# Altium PCB PCB1.PcbDoc (part 2 of 2)
Units mil, origin at the board's own origin, x right, y up, seen from the top; angles counter-clockwise.
Board outline 3937.01 x 3937.01 mil, 2 copper layers (Top Layer, Bottom Layer); 175 components, 130 nets, 583 pads, 648 vias.
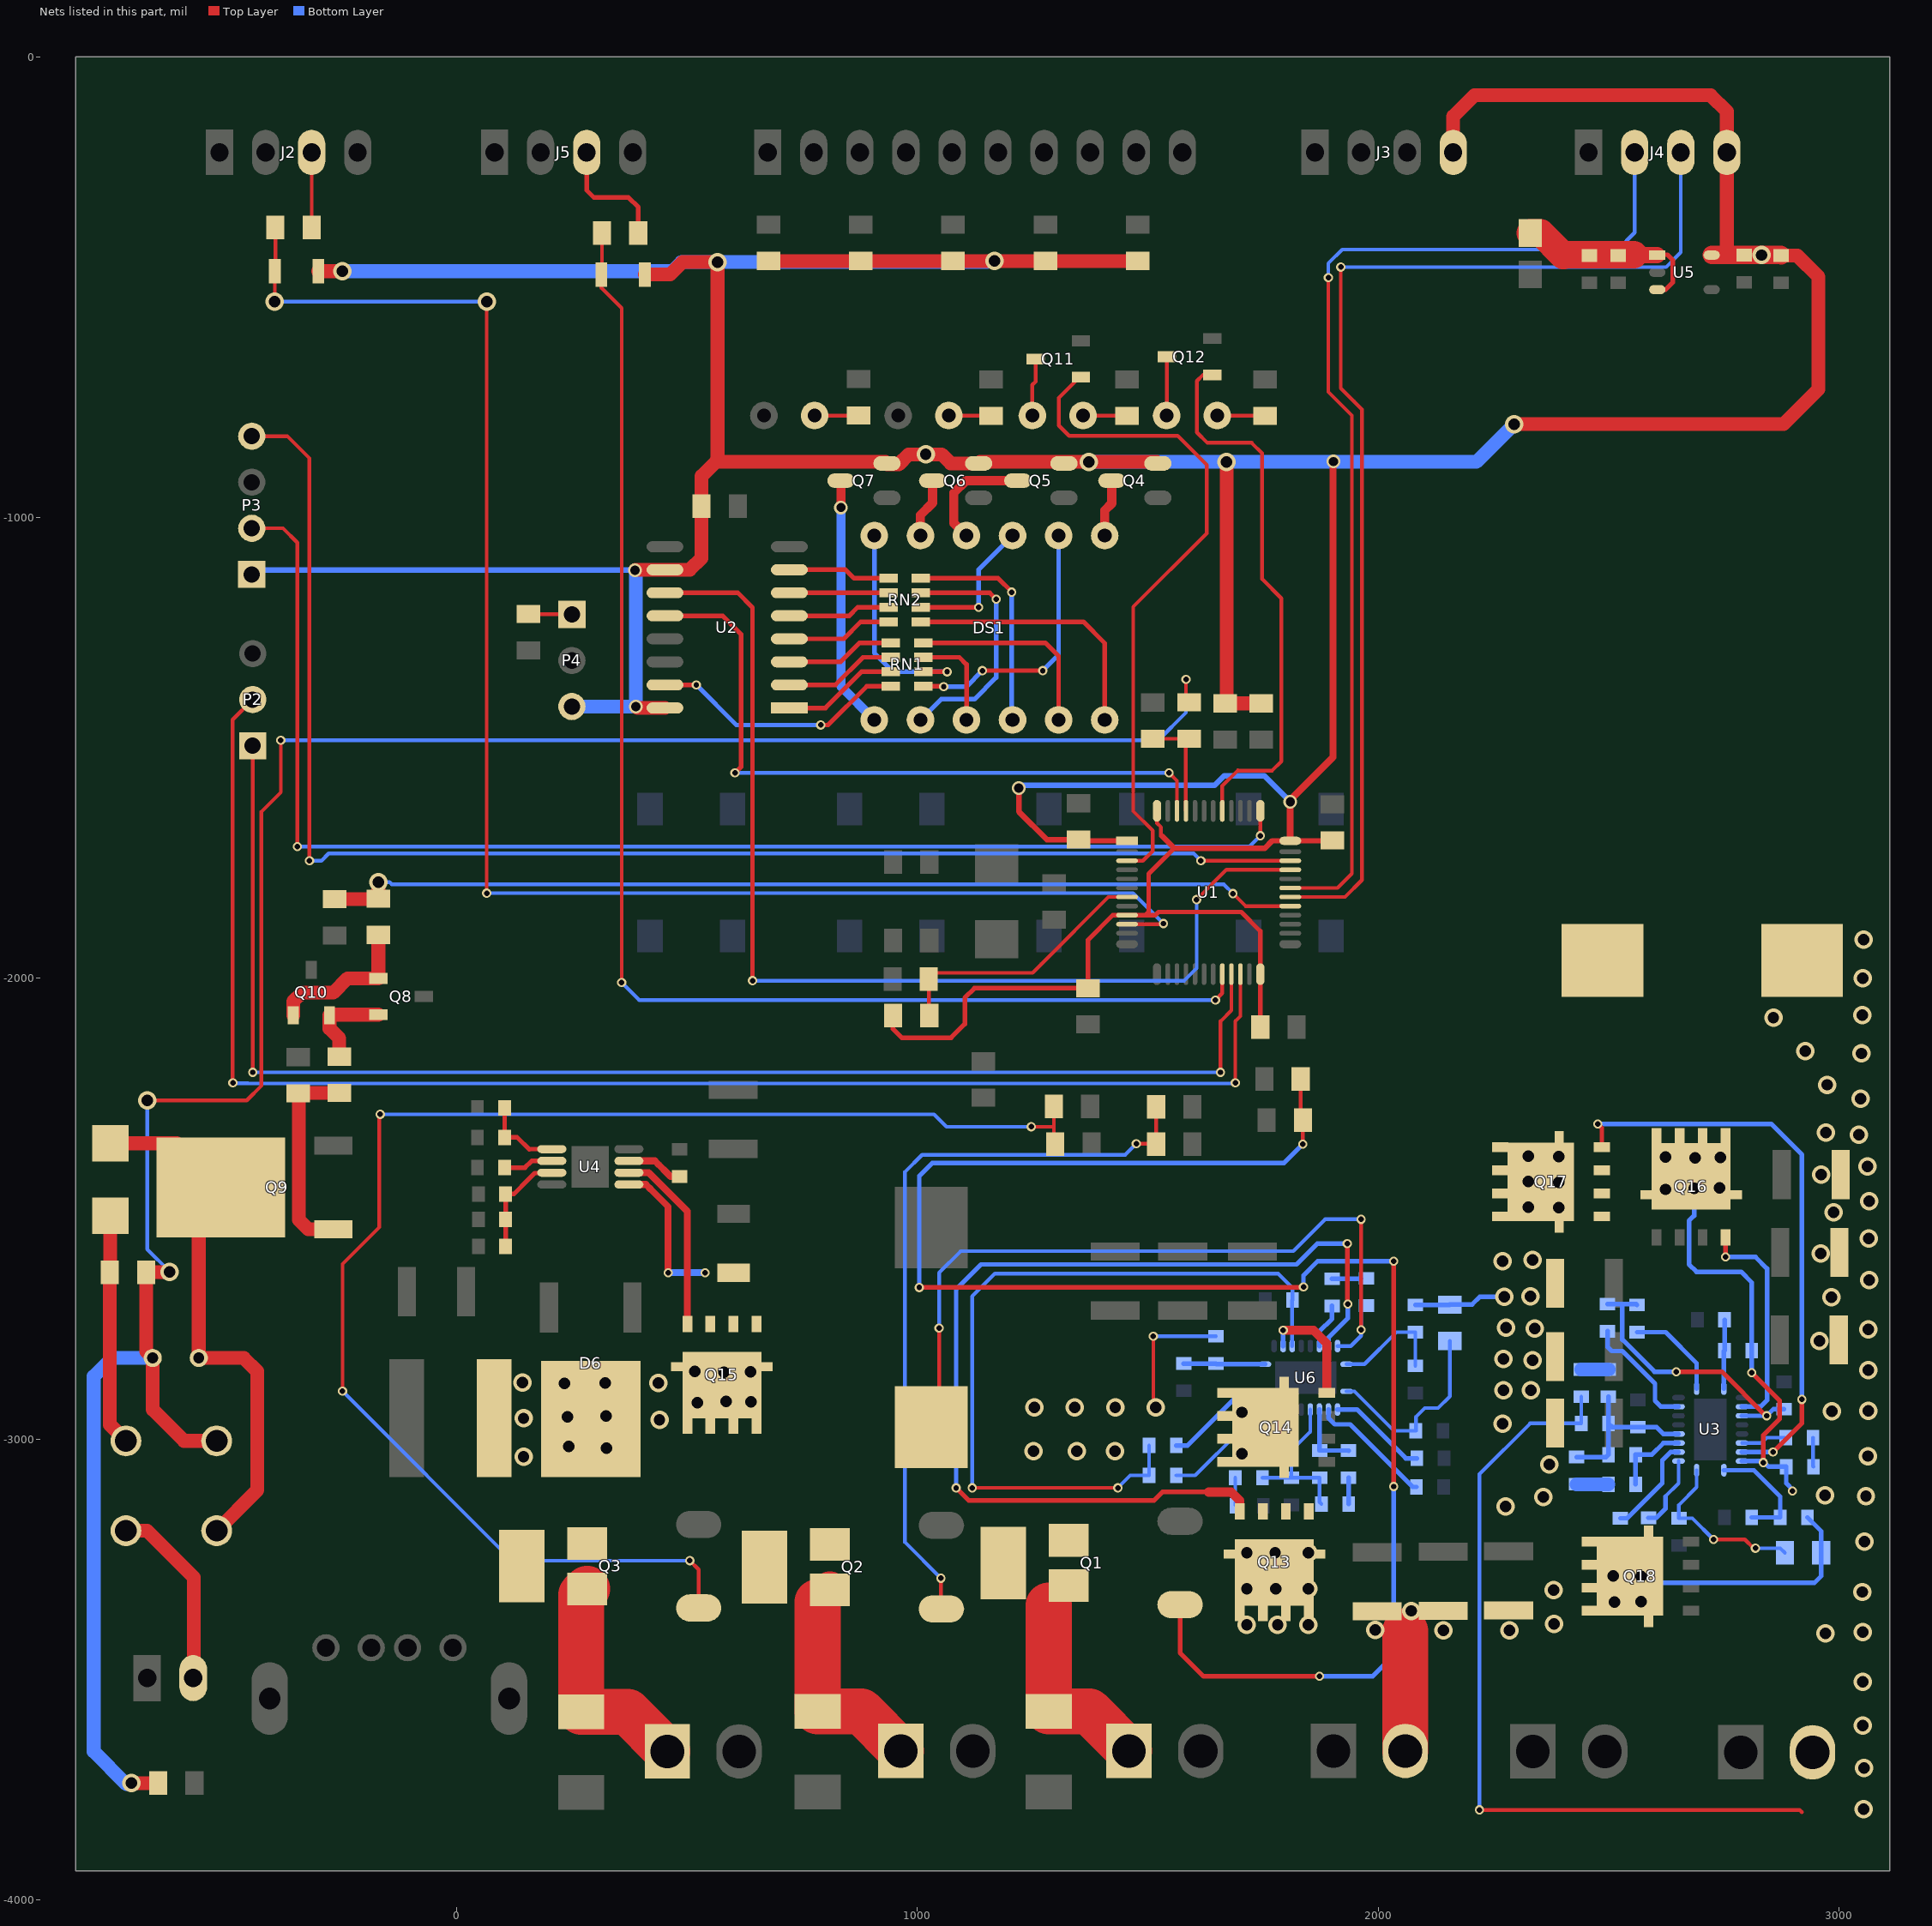
[diagram p2: the nets of this part, all layers, seen from the top]

## Via types
v1: diameter 40, hole 25, Top Layer to Bottom Layer, tented both sides, 514 vias
v2: diameter 20, hole 12, Top Layer to Bottom Layer, tented both sides, 122 vias
v3: diameter 30, hole 20, Top Layer to Bottom Layer, tented both sides, 9 vias
v4: diameter 25.98, hole 12.99, Top Layer to Bottom Layer, tented top, 2 vias
v5: diameter 50, hole 28, Top Layer to Bottom Layer, 1 vias

## Nets (pads, with @x,y where several pads share a name; then routed paths per layer and width w, separated by ;. In a path a pad name is that pad's centre, name@x,y a point inside that pad or via, vN(x,y) a via of type N, cw(c..) or ccw(c..) an arc to the next point about the centre after c; other vN are vias at no path point) (continued)
NetC3_2: C3.2 R15.2 U1.7 | length 563.6
  Top Layer w8: R15.2@1024.74,-2081 C3.2@1024.74,-2021.62 ; C3.2@1024.74,-2002 1038.74,-1988 1250,-1988 1269,-1969 1414.58,-1823.42 U1.7@1455,-1823.43
NetC12_1: C12.1 R19.1 | length 63.4
  Bottom Layer w8: R19.1@2944,-2997 2944,-3059 C12.1@2945,-3060
NetC12_2: C12.2 L3.1 Q16.5 Q16.6 Q16.7 Q16.8 Q17.1 Q17.2 Q17.3 R42.1 U3.19 | length 908.3
  Top Layer w10: v2(2811,-2856) 2813.15,-2858.15 2871.27,-2916.27 2871.27,-2956.73 2836,-2992 v2(2836,-3051)
  Bottom Layer w10: v1(2686,-2456) 2686,-2515 2675,-2526 2675,-2621 2691,-2637 2788,-2637 2811,-2660 R42.1@2811,-2808 v2(2811,-2856) ; U3.19@2789.9,-3047.9 v2@2835.9,-3047.9 ; v2@2837.5,-3049.5 2848,-3060 C12.2@2885.94,-3060 2885.94,-3095.94 v2@2901,-3111
  other v1: 2624,-2458 2741,-2455 2688,-2390 2743,-2389 2624,-2388
  other v2: 2899.3,-3112.7
NetC13_1: C13.1 U4.7 | length 134.9
  Top Layer w15: U4.7@373.66,-2396.2 430.2,-2396.2 431.2,-2397.2 ; 438.7,-2404.69 431.2,-2397.2 ; C13.1@484,-2430 464,-2430 431.2,-2397.2
NetC15_1: C15.1 U6.3 | length 271.1
  Bottom Layer w10: U6.3@1892.21,-2935.9 1892.21,-2954.21 1906,-2968 1939,-2968 2075,-3104 C15.1@2083,-3104
NetC16_1: C16.1 D8.2 R22.1 | length 503.4
  Top Layer w30: D8.2@-752,-2515.48 -752,-2637 R22.1@-753,-2638 -753,-2969 C16.1@-718,-3004
NetC17_1: C17.1 J10.2 | length 357.8
  Top Layer w30: C17.1@-718,-3199 -672,-3199 -571,-3300 -571,-3469
NetC17_2: C17.2 D8.1 L2.1 Q9.2 | length 1191.4
  Top Layer w30: D8.1@-752,-2358 -607.83,-2358 Q9.2@-511.83,-2454 -560,-2502.17 L2.1@-560,-2824 -462,-2824 -433,-2853 -433,-3110.85 C17.2@-521.15,-3199
NetC18_2: C18.2 R27.2 U4.1 | length 178.3
  Top Layer w10: C18.2@104.06,-2281 R27.2@104.06,-2345 131,-2345 157.61,-2371.61 ; 156.61,-2370.61 U4.1@206.34,-2370.61
NetC19_2: C19.2 R55.2 R56.1 U4.3 | length 233.5
  Top Layer w10: U4.3@206.34,-2421.8 205.34,-2422.8 169.2,-2422.8 156,-2436 124,-2468 C19.2@106.11,-2468 R56.1@106.11,-2581.94 ; R56.1@106.11,-2581.94 R56.1@106.06,-2582 R56.1@106.11,-2581.94
NetC21_2: C21.2 R21.2 U3.20 | length 253.1
  Bottom Layer w10: U3.20@2750.53,-3067.58 2815.58,-3067.58 2872.94,-3124.94 R21.2@2872.94,-3170 C21.2@2811.06,-3170
NetC30_2: C30.2 R42.2 U3.11 | length 150.1
  Bottom Layer w10: U3.11@2750.53,-2890.42 2750.53,-2809.42 R42.2@2751.94,-2808 2752.06,-2807.89 C30.2@2752.06,-2741
NetC36_1: C36.1 C37.1 U3.4 | length 167.7
  Bottom Layer w10: C36.1@2559,-3098 C37.1@2559,-3034 2594,-3034 2619.47,-3008.53 U3.4@2652.1,-3008.53
NetC36_2: C36.2 R48.2 | length 68.9
  Bottom Layer w30: R48.2@2431,-3098.06 C36.2@2499.89,-3098.06
NetC37_2: C37.2 C44.1 R48.1 R50.1 R51.2 U3.5 | length 358.5
  Bottom Layer w10: R48.1@2431,-3039 2494.94,-3039 C37.2@2499.94,-3034 2500.06,-3033.89 R51.2@2500.06,-2966 2508.06,-2974 R50.1@2564,-2974 2604,-2974 2618.84,-2988.84 U3.5@2652.1,-2988.84 ; R51.2@2500,-2965.94 C44.1@2500,-2908
NetC38_1: C38.1 R35.1 | length 63
  Bottom Layer w10: R35.1@1900,-2652 C38.1@1963,-2652
NetC38_2: C38.2 L5.1 Q13.1 Q13.2 Q13.3 Q14.5 Q14.6 Q14.7 Q14.8 R38.1 U6.19 | length 1917.2
  Top Layer w8: L5.1@1047,-2957 v2(1047,-2759) ; 1512,-2911 v2(1512,-2777) ; v2(1963,-2763) v2(1963,-2523)
  Bottom Layer w8: v2(1047,-2759) 1047,-2639 1094,-2592 1816,-2592 1885,-2523 v2(1963,-2523) ; v2(1512,-2777) R38.1@1648,-2777 ; U6.19@1911.9,-2798.1 1940.9,-2798.1 1963,-2776 v2(1963,-2763) C38.2@1963,-2711.06
  other v1: 1704,-3032 1252,-3026 1346,-3026 1429,-3026 1704,-2942 1254,-2931 1341.67,-2931 1429.33,-2931 1517,-2931
NetC39_2: C39.2 R37.2 U6.20 | length 251.1
  Bottom Layer w8: U6.20@1931.58,-2837.47 1970.53,-2837.47 2039.94,-2768.06 R37.2@2081,-2768.06 C39.2@2081,-2840.94
NetC40_2: C40.2 R38.2 U6.11 | length 177.1
  Bottom Layer w10: C40.2@1578,-2835.94 1578.11,-2836.06 R38.2@1648,-2836.06 1649.42,-2837.47 U6.11@1754.42,-2837.47
NetC44_2: C44.2 R52.2 | length 59
  Bottom Layer w30: R52.2@2441,-2848.94 C44.2@2500,-2848.94
NetC45_1: C45.1 U3.3 | length 215
  Bottom Layer w10: C45.1@2526,-3172 2541,-3172 2617,-3096 2617,-3046 2634.79,-3028.21 U3.3@2652.1,-3028.21
NetC51_1: C51.1 C52.1 U6.4 | length 152.3
  Bottom Layer w10: U6.4@1872.53,-2935.9 1872.53,-3024.47 C52.1@1873,-3024.94 1935.94,-3024.94 C51.1@1936,-3025
NetC51_2: C51.2 R41.2 | length 56.9
  Bottom Layer w10: C51.2@1936,-3084.06 1936,-3140.89 R41.2@1936.06,-3140.94
NetC52_2: C52.2 C53.1 R41.1 R43.1 R44.2 U6.5 | length 347.6
  Bottom Layer w8: C53.1@1749,-3083.94 1749.06,-3083.89 R44.2@1812,-3083.89 ; U6.5@1852.84,-2935.9 1852.84,-2984.1 R43.1@1812,-3024.94 R44.2@1812,-3083.89 ; R41.1@1877,-3140.94 1873,-3136.94 C52.2@1873,-3084 1872.89,-3083.89 R44.2@1812,-3083.89
NetC53_2: C53.2 R46.2 | length 61.8
  Bottom Layer w8: C53.2@1689.94,-3083.94 1689.94,-3142.94 R46.2@1691.94,-3144.94
NetD6_2: D6.2 L1.1 Q15.5 Q15.6 Q15.7 Q15.8
  other v1: 145,-3038 325,-3020 243,-3016 440,-2958 145,-2955 240,-2952 324,-2950 522,-2921 639,-2919 585,-2918 234,-2879 322,-2878 438,-2878 143,-2877 580,-2855 638,-2854 517,-2853
NetDL1_A: DL1.A R30.1 | length 95.4
  Top Layer w8: DL1.A@776.72,-778.37 871.63,-778.37 R30.1@872,-778
NetDL2_A: DL2.A R31.1 | length 92.2
  Top Layer w8: DL2.A@1068.06,-778.37 1159.37,-778.37 R31.1@1160,-779
NetDL3_A: DL3.A R32.1 | length 95.9
  Top Layer w8: DL3.A@1359.4,-778.37 1454.37,-778.37 R32.1@1455,-779
NetDL3_K: DL3.K Q11.3 | length 125.7
  Top Layer w8: DL3.K@1249.4,-778.37 1249.4,-711.6 1256.57,-704.43 Q11.3@1256.57,-655.63
NetDL4_A: DL4.A R33.1 | length 104.5
  Top Layer w8: DL4.A@1650.74,-778.37 1754.37,-778.37 R33.1@1755,-779
NetDL4_K: DL4.K Q12.3 | length 128.1
  Top Layer w8: DL4.K@1540.74,-778.37 1541.57,-777.53 Q12.3@1541.57,-650.63
NetDS1_a: DS1.a RN1.8 | length 580.4
  Top Layer w10: RN1.8@1012.45,-1366.05 v2@1056.05,-1366.05 ; v2(1141,-1332) v2(1272,-1332)
  Bottom Layer w10: v2(1057,-1367) 1106,-1367 v2(1141,-1332) ; v2(1272,-1332) 1306.49,-1297.51 DS1.a@1306.49,-1039
NetDS1_b: DS1.b RN1.6 | length 481.5
  Top Layer w10: RN1.6@1012.45,-1334.55 v2(1064.45,-1334.55)
  Bottom Layer w10: DS1.b@906.49,-1039 906.49,-1293.49 947.55,-1334.55 v2(1064.45,-1334.55)
NetDS1_c: DS1.c RN1.4 | length 220.9
  Top Layer w10: RN1.4@1012.45,-1303.06 1091.06,-1303.06 1106.49,-1318.49 DS1.c@1106.49,-1439
NetDS1_com1: DS1.com1 Q4.3 | length 125.8
  Top Layer w20: DS1.com1@1406.49,-1039 1406.49,-984.51 1422,-969 Q4.3@1422,-919.6
NetDS1_com2: DS1.com2 Q5.3 | length 254.3
  Top Layer w20: DS1.com2@1106.49,-1039 1079,-1011.51 1079,-946 1105.4,-919.6 Q5.3@1218,-919.6
NetDS1_com3: DS1.com3 Q6.3 | length 130.4
  Top Layer w20: DS1.com3@1006.49,-1039 1006.49,-994.51 1033,-968 Q6.3@1033,-919.6
NetDS1_com4: DS1.com4 Q7.3 | length 549.4
  Top Layer w20: v3(834,-978) 834,-921.6 Q7.3@834,-919.6
  Bottom Layer w20: v3(834,-978) 834,-1366.51 DS1.com4@906.49,-1439
NetDS1_d: DS1.d RN1.2 | length 444.5
  Top Layer w10: RN1.2@1012.45,-1271.56 1277.56,-1271.56 1306.49,-1300.49 DS1.d@1306.49,-1439
NetDS1_dp: DS1.dp RN2.2 | length 487.2
  Top Layer w10: RN2.2@1007.45,-1131.56 1175.28,-1131.56 v2@1204.52,-1160.8
  Bottom Layer w10: v2(1204.69,-1161.68) 1204.69,-1437.2 DS1.dp@1206.49,-1439
NetDS1_e: DS1.e RN2.8 | length 584.8
  Top Layer w10: RN2.8@1007.45,-1226.05 1360.05,-1226.05 1406.49,-1272.49 DS1.e@1406.49,-1439
NetDS1_f: DS1.f RN2.6 | length 311.5
  Top Layer w10: RN2.6@1007.45,-1194.55 v2(1133,-1194.55)
  Bottom Layer w10: v2(1133,-1194.55) 1133,-1112.49 DS1.f@1206.49,-1039
NetDS1_g: DS1.g RN2.4 | length 541.9
  Top Layer w10: RN2.4@1007.45,-1163.06 1157.06,-1163.06 v2(1170.92,-1176.92)
  Bottom Layer w10: DS1.g@1006.49,-1439 1051.49,-1394 1124,-1394 1170.92,-1347.08 v2(1170.92,-1176.92)
NetJ2_3: J2.3 R2.1 | length 163
  Top Layer w8: R2.1@-315,-370 J2.3@-315,-207
NetJ5_3: J5.3 R4.1 | length 272.4
  Top Layer w8: R4.1@389,-377 R4.1@394,-382
  Top Layer w10: J5.3@282,-207 282,-289 298,-305 373,-305 394,-326 R4.1@394,-382
NetP4_1: P4.1 R17.2 | length 94.3
  Top Layer w8: R17.2@156,-1209.26 249.26,-1209.26 P4.1@250,-1210
NetQ1_1: Q1.1 R1.2 R3.2 | length 3777.7
  Top Layer w8: R3.2@1831.74,-2218 1831.74,-2303 R1.2@1836.74,-2308 v2(1836.74,-2359.74)
  Top Layer w10: v2(1004,-2671) v2@1837,-2671 ; Q1.1@1570.06,-3359.55 1570.06,-3464.06 1621,-3515 v2(1873,-3515) ; v2(2034,-3103) v2(2034,-2614)
  Bottom Layer w10: v2(1004,-2671) 1004,-2430 1004,-2429 1032,-2401 1795.48,-2401 v2(1836.74,-2359.74) ; v2(1838,-2670) 1838,-2645 1869,-2614 v2(2034,-2614) ; v2(1873,-3515) 1988,-3515 2034,-3469 v2(2034,-3103)
NetQ2_1: Q2.1 R5.2 R6.2 | length 1632.9
  Top Layer w8: v2(1051,-3302) 1051,-3367.49 Q2.1@1052.06,-3368.55 ; v2(1475,-2359) 1517.52,-2359 R6.2@1518.26,-2359.74 R5.2@1518.26,-2279
  Bottom Layer w8: v2(1051,-3302) 973,-3224 973,-2420 1010,-2383 1451,-2383 v2(1475,-2359)
NetQ3_1: Q3.1 R10.2 R11.2 | length 3208.3
  Top Layer w8: v2(-248,-2896) -248,-2620 -168,-2540 -168,-2297 v2(-166,-2295) ; v2(506,-3264) 525.06,-3283.06 Q3.1@525.06,-3366.55 ; v2(1247,-2322) 1296.26,-2322 ; R10.2@1296.26,-2278 1296.26,-2322 ; R11.2@1299.26,-2359.74 1296.26,-2356.74 1296.26,-2322
  Bottom Layer w8: v2(-248,-2896) 120,-3264 v2(506,-3264) ; v2(-166,-2295) 1036,-2295 1063,-2322 v2(1247,-2322)
NetQ8_1: Q8.1 Q10.1 R23.2 | length 330
  Top Layer w30: Q10.1@-355,-2080 -355,-2050 -336,-2031 -268,-2031 -237,-2000 Q8.1@-170,-2000 R23.2@-170,-1905.74
NetQ8_2: Q8.2 Q10.2 R24.1 | length 205.6
  Top Layer w30: R24.1@-255,-2170 -255,-2130 -276.26,-2108.74 Q10.2@-276.26,-2080 -275,-2078.74 Q8.2@-170,-2078.74
NetQ9_1: Q9.1 R24.2 R26.2 | length 449.3
  Top Layer w30: Q9.1@-267.74,-2544.55 -322.45,-2544.55 -343,-2524 -343,-2250.74 R26.2@-344,-2249.74 -343,-2248.74 R24.2@-255,-2248.74 R24.2@-256,-2249.74
NetQ13_4: Q13.4 U6.18 | length 2238
  Top Layer w10: v2(1084,-3106) 1111,-3133 1514,-3133 1532,-3115 1632,-3115 ; v2@1933,-2707 v2(1933,-2576)
  Top Layer w20: 1632,-3115 1681,-3115 1699.79,-3133.79 Q13.4@1699.79,-3157.13
  Bottom Layer w10: v2(1084,-3106) 1084,-2675 1138,-2621 1823,-2621 1868,-2576 1908,-2576 ; U6.18@1892.21,-2798.1 1892.21,-2779.79 1934,-2738 v2(1934,-2707) ; 1920,-2576 1908,-2576 ; v2(1933,-2576) 1908,-2576
NetQ14_4: Q14.4 U6.13 | length 247.7
  Top Layer w20: v2(1794,-2764) 1860,-2764 1888.6,-2792.6 Q14.4@1888.6,-2899.62
  Bottom Layer w10: U6.13@1793.79,-2798.1 1793.79,-2764.21 v2(1794,-2764)
NetQ15_1: Q15.1 Q15.2 Q15.3 R45.2 U4.5 | length 342
  Top Layer w15: U4.5@373.66,-2447.39 410.61,-2447.39 411.61,-2448.39 ; 421.1,-2457.87 411.61,-2448.39 ; v2(459,-2639) 459,-2495.77 411.61,-2448.39
  Bottom Layer w15: v2(459,-2639) v2(539,-2639)
NetQ15_4: Q15.4 U4.6 | length 420.5
  Top Layer w15: U4.6@373.66,-2421.8 416.8,-2421.8 417.8,-2422.8 ; 427.75,-2432.75 417.8,-2422.8 ; Q15.4@500.62,-2750.4 500.62,-2505.62 417.8,-2422.8
NetQ16_4: Q16.4 U3.13 | length 488.4
  Top Layer w10: v2(2754.38,-2604.62) Q16.4@2754.38,-2562.6
  Bottom Layer w10: v2(2754.38,-2604.62) 2819,-2604.62 2844.27,-2629.89 2844.27,-2915.73 2830.21,-2929.79 U3.13@2789.9,-2929.79
NetQ17_4: Q17.4 U3.18 | length 1263.5
  Top Layer w10: v2(2477,-2316) 2485.6,-2324.6 Q17.4@2485.6,-2366.62 ; v2(2857.21,-3028.21) 2920,-2965.42 v2(2920,-2914)
  Bottom Layer w10: v2(2477,-2316) 2853,-2316 2920,-2383 v2(2920,-2914) ; U3.18@2789.9,-3028.21 v2(2857.21,-3028.21)
NetR19_2: R19.2 U3.17 | length 99.8
  Bottom Layer w8: U3.17@2789.9,-3008.53 2832.47,-3008.53 2844,-2997 R19.2@2884.94,-2997
NetR20_1: R20.1 R54.2 U3.1 | length 381.4
  Top Layer w8: v2(2728,-3218) 2796,-3218 2815,-3237 v2(2819,-3237)
  Bottom Layer w8: U3.1@2691.47,-3067.58 2691.47,-3104.53 2653,-3143 R54.2@2653,-3171.94 2681.94,-3171.94 v2(2728,-3218) ; v2(2819,-3237) 2873,-3237 R20.1@2883,-3247
NetR28_1: R28.1 U4.2 | length 108.5
  Top Layer w10: R28.1@104,-2411 148,-2411 161.8,-2397.2 162.8,-2396.2 U4.2@206.34,-2396.2
NetR34_2: R34.2 R36.1 U6.1 | length 428.4
  Bottom Layer w8: U6.1@1931.58,-2896.53 1948.53,-2896.53 2034,-2982 R34.2@2081.94,-2982 2081.94,-2952.06 2101.22,-2932.78 2130.22,-2932.78 2156,-2907 R36.1@2156,-2787
NetR35_2: R35.2 U6.17 | length 98.4
  Bottom Layer w10: U6.17@1872.53,-2798.1 1872.53,-2766.47 1900,-2739 R35.2@1900,-2711.06
NetR39_1: R39.1 U6.10 | length 242.1
  Bottom Layer w10: R39.1@1563,-3014 R39.1@1562,-3014 1586.53,-3014 1704,-2896.53 U6.10@1754.42,-2896.53
NetR40_1: R40.1 U6.8 | length 311.2
  Bottom Layer w8: R40.1@1562,-3079 1603,-3079 1699,-2983 1781,-2983 1793.79,-2970.21 U6.8@1793.79,-2935.9
NetR47_2: R47.2 U6.2 | length 216
  Bottom Layer w10: U6.2@1911.9,-2935.9 1953.9,-2935.9 2060,-3042 R47.2@2083.94,-3042
NetR49_1: R49.1 U3.10 | length 212.4
  Bottom Layer w10: R49.1@2562,-2768 2624,-2768 2691.47,-2835.47 U3.10@2691.47,-2890.42
NetR53_2: R53.2 U3.2 | length 160
  Bottom Layer w8: 2623.55,-3124.45 2652.1,-3095.9 U3.2@2652.1,-3047.9
  Bottom Layer w10: R53.2@2587,-3170.94 2604.06,-3170.94 2623.55,-3151.45 2623.55,-3124.45
NetR57_1: R57.1 U3.8 | length 263.5
  Bottom Layer w10: R57.1@2498,-2766 2498,-2800 2506.98,-2808.98 2529.98,-2808.98 2601,-2880 2601,-2917 2613.79,-2929.79 U3.8@2652.1,-2929.79
NetRN1_1: RN1.1 U2.3 | length 237.6
  Top Layer w10: U2.3@722,-1313 833,-1313 874.44,-1271.56 RN1.1@942.45,-1271.56
NetRN1_3: RN1.3 U2.2 | length 245.3
  Top Layer w10: U2.2@722,-1363 822,-1363 881.94,-1303.06 RN1.3@942.45,-1303.06
NetRN1_5: RN1.5 U2.1 | length 252.9
  Top Layer w10: U2.1@722,-1413 800.28,-1413 878.73,-1334.55 RN1.5@942.45,-1334.55
NetRN1_7: RN1.7 U2.15 | length 561.3
  Top Layer w10: U2.15@452,-1363 v2(520,-1363) ; v2(790,-1450) 806,-1450 889.95,-1366.05 RN1.7@942.45,-1366.05
  Bottom Layer w10: v2(520,-1363) 607,-1450 v2(790,-1450)
NetRN2_1: RN2.1 U2.7 | length 223.1
  Top Layer w10: U2.7@722,-1113 844,-1113 862.56,-1131.56 RN2.1@937.45,-1131.56
NetRN2_3: RN2.3 U2.6 | length 215.4
  Top Layer w10: U2.6@722,-1163 RN2.3@937.39,-1163
NetRN2_5: RN2.5 U2.5 | length 223.1
  Top Layer w10: U2.5@722,-1213 852,-1213 870.45,-1194.55 RN2.5@937.45,-1194.55
NetRN2_7: RN2.7 U2.4 | length 230.8
  Top Layer w10: U2.4@722,-1263 840,-1263 876.95,-1226.05 RN2.7@937.45,-1226.05
OUT1: D1.A J1.1 Q1.2 | length 439.6
  Top Layer w100: 1284.97,-3361.18 D1.A@1284.97,-3591 1373.09,-3591 J1.1@1459.09,-3677
OUT2: D4.A J6.1 Q2.2 | length 491
  Top Layer w80: Q2.2@783.49,-3353.66 Q2.2@809.94,-3327.21
  Top Layer w100: Q2.2@783.49,-3353.66 D4.A@783.49,-3591 878.09,-3591 J6.1@964.09,-3677
OUT3: D5.A J7.1 Q3.2 | length 494.9
  Top Layer w100: Q3.2@282.94,-3325.21 270,-3338.15 D5.A@270,-3592 371.09,-3592 J7.1@457.09,-3678
PWM: R23.1 R25.2 U1.29 | length 2199.7
  Top Layer w8: v2(1685,-1816) 1712.11,-1843.11 U1.29@1809.33,-1843.11 1742.11,-1843.11
  Top Layer w30: R25.2@-265,-1828.26 -171.26,-1828.26 R23.1@-170,-1827 v1(-170,-1791)
  Bottom Layer w8: v1(-170,-1791) -146,-1791 -141,-1796 1665,-1796 v2(1685,-1816)
PWM_AD: C16.2 L2.2 R16.1 R22.2 R60.1 | length 5260.4
  Top Layer w8: v1(-672,-2265) -456,-2265 -424,-2233 -424,-2075 ; -424,-2163 -424,-2075 ; v2(-382,-1483) -382,-1596 -424,-1638 -424,-2075 ; R16.1@1583,-1401 v2(1583,-1351)
  Top Layer w30: v1(-706,-3747) R60.1@-648,-3747 ; v1(-623,-2637) -624,-2638 R22.2@-674.26,-2638 -674.26,-2809.74 L2.2@-660,-2824 -660,-2936 -592,-3004 C16.2@-521.15,-3004
  Bottom Layer w8: v1(-672,-2265) -672,-2588 v1(-623,-2637) ; v2(-382,-1483) 1523,-1483 1583,-1423 v2(1583,-1351)
  Bottom Layer w30: v1@-717,-3749 -788,-3678 -788,-2864 -748,-2824 L2.2@-660,-2824
PWM_AD_OUT: R16.2 R18.1 U1.45 | length 237.7
  Top Layer w8: R18.1@1505,-1480 R18.1@1511,-1480 1582.74,-1480 1583,-1479.74 1586.5,-1483.24 R16.2@1589.19,-1485.93 ; R16.2@1582.19,-1485.93 1582.19,-1635.65 U1.45@1582.95,-1636.42
RX: J4.2 U1.31 | length 2359.3
  Top Layer w8: U1.31@1809.33,-1803.74 1912,-1803.74 1943,-1772.74 1943,-778 1892,-727 v2(1892,-479)
  Bottom Layer w8: v2(1892,-479) 1892,-460 1892,-448 1922,-418 2457,-418 2520.23,-418 2557,-381.23 J4.2@2557,-207
RX3: P2.2 U1.22 | length 3266.3
  Top Layer w8: v2(-486,-2227) -486.53,-2226.47 -486.53,-1438.53 P2.2@-443,-1395 ; v2(1690,-2227) 1690,-2093 1701.06,-2081.94 U1.22@1701.06,-1990.75
  Bottom Layer w8: v2(-486,-2227) -485.5,-2227.5 -452.77,-2227.5 -420,-2228 v2@1689,-2228
SH_CP: U1.33 U2.11 | length 2391.5
  Top Layer w8: v2(1606,-1829) 1670.63,-1764.37 U1.33@1809.33,-1764.37
  Top Layer w10: U2.11@452,-1163 609.95,-1163 642,-1195.05 v2(642,-2005)
  Bottom Layer w8: v2(642,-2005) 1579,-2005 1606,-1978 1606,-1854 ; v2@1606,-1830 1606,-1854 ; v2(1606,-1829) 1606,-1854
ST_CP: U1.46 U2.12 | length 1519.5
  Top Layer w8: v2(1546,-1554) 1563.27,-1571.27 U1.46@1563.27,-1636.42
  Top Layer w10: U2.12@452,-1213 577,-1213 617,-1253 617,-1541 v2(604,-1554)
  Bottom Layer w8: v2(604,-1554) v2(1546,-1554)
SW1_IN: Q11.1 U1.3 | length 1488.4
  Top Layer w8: Q11.1@1355,-695 1352,-695 1307,-740 1307,-800 1329.37,-822.37 1565,-822.37 1628,-885.37 1628,-1034 1468.49,-1193.51 1468.49,-1533 ; U1.3@1455,-1744.68 1489.43,-1744.68 1510.62,-1723.49 1510.62,-1679.27 1468.49,-1637.13 1468.49,-1533 ; 1468.49,-1513.69 1468.49,-1533
SW2_IN: Q12.1 U1.41 | length 1201.6
  Top Layer w8: Q12.1@1640,-690 1620,-690 1606.74,-703.26 1606.74,-814.74 1629.5,-837.5 1725.5,-837.5 1748,-860 1748,-1133 1790,-1175 1790,-1529 1769.96,-1549.04 1696,-1549.04 1695.48,-1548.52 1661.69,-1582.31 U1.41@1661.69,-1636.42
SW11_IN: D2.A R2.2 U1.10 | length 3481.5
  Top Layer w8: v1(-395,-531) D2.A@-395,-465 -393.74,-463.74 R2.2@-393.74,-370 ; v2(65,-1815) v1(65,-531) ; U1.10@1455,-1882.48 1532.52,-1882.48 v2(1534,-1881)
  Bottom Layer w8: v1(-395,-531) v1(65,-531) ; v2(65,-1815) 1468,-1815 v2(1534,-1881)
SW22_IN: D3.A R4.2 U1.20 | length 3012.8
  Top Layer w8: R4.2@315.26,-382 315.26,-470.74 D3.A@314,-472 314,-501 358,-545 358,-631 v2(358,-2009) ; v2(1647,-2047) 1661.69,-2032.31 U1.20@1661.69,-1990.75
  Bottom Layer w8: v2(358,-2009) 396,-2047 v2(1647,-2047)
SWCLK: P3.2 U1.37 | length 2926
  Top Layer w8: P3.2@-445,-1023 -377,-1023 -346,-1054 v2(-346,-1714) ; v2(1744.37,-1690.37) U1.37@1744.37,-1636.42
  Bottom Layer w8: v2(-346,-1714) 1720.74,-1714 v2(1744.37,-1690.37)
SWD: P3.4 U1.34 | length 3160.7
  Top Layer w8: P3.4@-445,-823 -368,-823 -319.69,-871.31 v2(-319.69,-1744.69) ; v2(1615.31,-1744.69) U1.34@1809.33,-1744.69
  Bottom Layer w8: v2(-319.69,-1744.69) -293.69,-1744.69 -278,-1729 1599.63,-1729 v2(1615.31,-1744.69)
TX: J4.3 U1.30 | length 2495.8
  Top Layer w8: U1.30@1809.33,-1823.43 1928,-1823.42 1965,-1786.42 1965,-765 1948,-748 ; v2(1919,-456) 1919,-719 1948,-748 ; 1943,-743 1948,-748
  Bottom Layer w8: v2(1919,-456) 2625,-456 2657,-424 J4.3@2657,-207
TX3: P2.1 U1.21 | length 3044.9
  Top Layer w8: v2(-443,-2204) P2.1@-443,-1495 ; v2(1658,-2204) 1658,-2093 1681.38,-2069.62 U1.21@1681.38,-1990.75
  Bottom Layer w8: v2(-443,-2204) -412,-2204 ; -424,-2204 -412,-2204 ; v2(1658,-2204) -412,-2204
VCC: C27.2 C28.1 FU2.2 U5.1 U5.3 | length 446.5
  Top Layer w10: U5.3@2606,-504.8 2624,-504.8 2640,-488.8 2640,-441 2628,-429 U5.1@2618.44,-429
  Top Layer w35: C28.1@2520.92,-430.92 2555.06,-430.94 2556,-430 U5.1@2606,-430
  Top Layer w60: FU2.2@2330,-382 2353,-382 2401.94,-430.94 2403.6,-429.29 2520.92,-429.29 2555.06,-429.29
VCC_3.3V: C4.2 C5.2 C6.2 C7.2 C8.2 C25.1 C26.2 D2.K D3.K J3.4 J4.4 P3.1 P4.3 Q4.2 Q5.2 Q6.2 Q7.2 R7.2 R8.2 R9.2 R12.1 R13.1 R15.1 R58.2 R59.1 U1.1 U1.9 U1.24 U1.36 U1.48 U2.10 U2.16 U5.5 | length 12998.4
  Top Layer w8: U1.48@1519.96,-1636.42 1519.96,-1663.15 1528.62,-1671.81 1528.62,-1688.62 1530.62,-1690.62
  Top Layer w10: R15.1@947,-2081 947,-2110 966,-2129 1003,-2129 1073,-2129 1103,-2099 1103,-2042 1123.74,-2021.26 1238,-2021.26 1307,-2021.26 C4.2@1370,-2021.26 1370,-1917 1424.21,-1862.79 U1.9@1455,-1862.8 1495.21,-1862.79 ; 1558,-1718 1557,-1718 1502,-1773 1502,-1856 1495.21,-1862.79 ; C6.2@1744.26,-2106 1744.37,-2105.89 U1.24@1744.37,-1990.75 1744.37,-1897.37 1703,-1856 1523.64,-1856 1516.85,-1862.79 1495.21,-1862.79
  Top Layer w12: v3(1220,-1587) 1220,-1638 1280.74,-1698.74 C5.2@1350,-1698.74 1352.64,-1701.38 U1.1@1455,-1701.38 ; 1530.62,-1690.62 1558,-1718 1753.51,-1718 1770.13,-1701.38 U1.36@1809.33,-1701.38 1900.36,-1701.38 C7.2@1901,-1700.74
  Top Layer w15: U1.36@1809.33,-1701.38 v3(1809.33,-1616.67) 1809.33,-1612.67 1902,-1520 1902,-878 v3(1903,-878)
  Top Layer w30: D2.K@-300.51,-465 v1(-248,-465) ; v3@388,-1113 U2.10@452,-1113 506,-1113 531.26,-1087.74 C8.2@531.26,-975 531.26,-909.74 562.15,-878.85 930.65,-878.85 Q7.2@934,-882.2 ; v3@392,-1413 U2.16@452,-1413 ; D3.K@408.49,-472 463,-472 490,-445 v1(566,-445) 566,-875 ; R9.2@677,-442.74 R8.2@877.25,-442.74 R7.2@1077.5,-442.74 v1(1167,-442.74) R59.1@1277.75,-442.74 R58.2@1478,-442.74 ; Q7.2@934,-884.2 959.32,-884.2 981,-862.51 v1(1018,-862.51) 1052.51,-862.51 1072.2,-882.2 Q6.2@1133,-882.2 1136.35,-878.85 1314.65,-878.85 Q5.2@1318,-882.2 1321.35,-878.85 v1(1372,-878.85) 1518.65,-878.85 Q4.2@1522,-882.2 ; R13.1@1668,-1403 1671,-1400 v1(1671,-879) ; R13.1@1671,-1403 R12.1@1746,-1403 ; J3.4@2163,-207 2163,-129 2209,-83 2722,-83 2757,-118 J4.4@2757,-207 2757,-430 ; v1(2295,-797) 2880,-797 2956,-721 2956,-477 2909.94,-430.94 C26.2@2875,-430.94
  Top Layer w40: U5.5@2724.11,-430 2757,-430 C25.1@2795,-430 v1(2832,-430) 2874.06,-430 C26.2@2875,-430.94
  Bottom Layer w12: P3.1@-445,-1123 -436,-1114 v3(387,-1114) ; v3(1220,-1587) 1225.73,-1581.27 1644.73,-1581.27 1666,-1560 1752.66,-1560 v3(1809.33,-1616.67)
  Bottom Layer w30: v1(-248,-465) 468,-465 488,-445 v1(566,-445) 956,-445 v1@1151,-445 ; P4.3@250,-1410 v3(389,-1410) 389,-1116 v3(387,-1114) ; v1(1372,-878.85) 1671,-878.85 1903,-878.85 2093,-878.85 2213.15,-878.85 v1(2295,-797)
VCC_12_24: C22.1 C33.1 C34.1 J13.2 L3.2 R51.1 R52.1 | length 1755.6
  Top Layer w8: v2(2220,-3805) 2915,-3805 2920,-3810
  Bottom Layer w8: v2(2220,-3805) 2220,-3076 2330,-2966 R51.1@2441,-2966 R52.1@2441,-2908
  other v1: 3054,-3803 3055,-3714 3052,-3622 3052,-3527 2971,-3422 3052,-3419 3051,-3332 3056,-3223 3059,-3124 2970,-3122 3063,-3037 2985,-2940 3064,-2939 3064,-2850 2958,-2787 3064,-2762 2984,-2692 3065.63,-2655.07 2961,-2597 3065,-2565 2989,-2508 3066,-2484 2962,-2426 3062,-2408 3044,-2339 2972,-2335 3047,-2261 2974.37,-2231 3049,-2163 2927,-2158 2858,-2085 3051,-2080 3052,-2000 3054,-1916
VCC_L: C50.1 R39.2 R40.2 U6.14 | length 1730.9
  Top Layer w8: v2(1119,-3106) v2(1435,-3106)
  Bottom Layer w8: v2(1119,-3106) 1119,-2690 1168,-2641 1783,-2641 1814,-2672 C50.1@1814,-2698 ; v2(1435,-3106) 1462,-3079 R40.2@1502.94,-3079 R39.2@1502.94,-3014 ; 1812.74,-2733.73 1813.47,-2733 ; U6.14@1813.47,-2798.1 1813.47,-2733 ; C50.1@1813.47,-2698.53 1813.47,-2733
VCC_L1: C35.1 R49.2 R57.2 U3.14 | length 621
  Top Layer w10: v2(2647,-2854) 2746,-2854 2841.47,-2949.47 v2(2843.53,-2949.47)
  Bottom Layer w10: R57.2@2498,-2706.94 2530,-2706.94 ; R49.2@2562,-2708.94 2560,-2706.94 2530,-2706.94 ; v2(2647,-2854) 2600,-2854 2530,-2784 2530,-2706.94 ; U3.14@2789.9,-2949.47 v2(2843.53,-2949.47) 2858,-2935 C35.1@2881,-2935
VIN: C10.1 C11.1 C14.1 C20.1 C29.1 C31.1 J8.2 Q13.5 Q13.6 Q13.7 Q13.8 Q17.5 Q17.6 Q17.7 Q17.8 Q18.5 Q18.6 Q18.7 Q18.8 R20.2 R21.1 R36.2 R37.1 | length 986.5
  Top Layer w100: J8.2@2059,-3677 2059,-3417
  Bottom Layer w10: R37.1@2081,-2709 2155.26,-2709 R36.2@2156,-2708.26 ; R36.2@2155.26,-2708 2156,-2708 2204,-2708 2221,-2691 v1(2274,-2691) ; v1@2582,-3312 2947,-3312 2961.74,-3297.26 R20.2@2961.74,-3247 2961.74,-3199.74 R21.1@2932,-3170
  other v1: 2142,-3415 2285,-3415 1994,-3414 1715,-3403 1782,-3403 1849,-3403 2382,-3401 2072,-3373 2513,-3354 2571,-3353 2381,-3328 1715,-3325 1778,-3325 1849,-3325 2571,-3298 2510,-3297 1715,-3247 1776.5,-3247 1849,-3247 2277,-3146 2359,-3126 2372,-3055 2270,-2967 2272,-2894 2332,-2894 2335,-2829 2272,-2826 2340,-2760 2278,-2758 2331,-2690 2270,-2614 2335,-2611 2392,-2498 2326,-2497 2392,-2443 2326,-2441 2392,-2387 2326,-2386
pads on no net: J2.1 J5.1 U2.9 U3.7 U6.7 USB1.2 USB1.3 USB1.6

## Polygon pours and split planes (outlines as drawn)
AGND1 on Top Layer "Top Layer-No Net" (solid, remove dead copper, pour order 1000): -893,-1879 -139,-1879 -134,-1884 -137,-1887 -137,-1954 -137,-2149 -91,-2195 -83,-2187 930,-2187 1034,-2187 1071,-2224 1072,-2223 1162,-2223 2202,-2223 2218,-2207 2229,-2196 2229,-2114 2229,-1067 2251,-1045 2292,-1004 3316,-1004 3316,-3865 3166,-4015 3122,-4059 -1043,-4059 -1043,-3928 -1099,-3872 -854,-3627 -854,-1879
GND on Top Layer "Top Layer-No Net" (solid, remove dead copper, pour order 1001): -1153.12,247.52 -1109.12,203.52 3397.88,203.52 3397.88,-730.48 3246.88,-881.48 3221.88,-906.48 2169.88,-906.48 2169.88,-2147.48 2140.88,-2176.48 2140.23,-2177.12 1880.3,-2177.12 -22.48,-2177.12 -73.12,-2126.48 -67.86,-2121.22 -67.86,-1862.47 -69.13,-1862.47 -98.12,-1833.48 -100.12,-1831.48 -839.12,-1831.48 -839.12,17.52 -1027.12,205.52
AGND1 on Bottom Layer "Top Layer-No Net" (solid, remove dead copper, pour order 1002): -893,-1879 -139,-1879 -134,-1884 -137,-1887 -137,-1954 -137,-2149 -91,-2195 -83,-2187 930,-2187 1034,-2187 1071,-2224 1072,-2223 1162,-2223 2202,-2223 2218,-2207 2229,-2196 2229,-2114 2229,-1067 2251,-1045 2292,-1004 3316,-1004 3316,-3865 3166,-4015 3122,-4059 -1043,-4059 -1043,-3928 -1099,-3872 -854,-3627 -854,-1879
GND on Bottom Layer "Top Layer-No Net" (solid, remove dead copper, pour order 1003): -1122.72,218.44 -1078.72,174.44 3428.28,174.44 3428.28,-759.56 3277.28,-910.56 3252.28,-935.56 2200.28,-935.56 2200.28,-2176.56 2171.28,-2205.56 2170.63,-2206.2 1910.7,-2206.2 7.92,-2206.2 -42.72,-2155.56 -37.46,-2150.3 -37.46,-1891.55 -38.73,-1891.55 -67.72,-1862.56 -69.72,-1860.56 -808.72,-1860.56 -808.72,-11.56 -996.72,176.44

## Keep-outs
Keep-Out Layer:
  the board outline again, w10

## Other copper
Top Layer:
  rectangle net AGND1: 2711,-3699 2856,-3657
  rectangle net AGND1: 2766,-3771 2807,-3593
  rectangle net AGND1: 2238,-3692 2409,-3650
  rectangle net AGND1: 2309,-3774 2353,-3549
  rectangle net AGND1: 1880,-3781 1921,-3586
  rectangle net AGND1: 1814,-3692 1982,-3650
  rectangle net AGND1: 2327,-3253.77 2351.37,-3218
  rectangle net AGND1: 1537,-2790 1770,-2716
  rectangle net AGND1: 1323,-2777 1486.51,-2702
  rectangle net AGND1: 1305,-2738.51 1860,-2691
  rectangle net AGND1: 1855.88,-3084 1935,-2925.25
  rectangle net AGND1: 2327,-3284 2383,-3233
  rectangle net AGND1: 1937,-3288 2337,-3204
  rectangle net AGND1: 147,-2784 431,-2617
  rectangle net AGND1: 2845,-2858 2918,-2821
  rectangle net AGND1: 2832,-2838 2915,-2339
  rectangle net AGND1: 2512,-3048 2551,-2987
  rectangle net AGND1: 2460,-3006 2546.64,-2561
  rectangle net AGND1: 2549,-2606 2714,-2527
  rectangle net AGND1: 259,-2490 319,-2327
  rectangle net OUT1: 1138,-3356 1374,-3182
  rectangle net OUT3: 85,-3354.93 341.24,-3184
  rectangle net OUT2: 614,-3362 855,-3188
  region net AGND1: 2460.29,-2975 2521.95,-2975 2521.95,-3042.05 2516.29,-3047.71 2500.33,-3047.71 2460.29,-3007.67
  region net +12V: 1788,-2434 1788,-2640 774,-2640 679,-2545 548,-2545 531,-2528 531,-2394 530,-2394 522,-2386 465,-2386 459,-2380 345,-2380 341,-2376 341,-2367 346,-2362 459,-2362 466,-2355 523,-2355 548,-2330 863,-2330 863,-2434
  region net NetQ15_1: 527,-2604 665,-2604 673,-2612 673,-2770 665,-2778 536,-2778 521,-2763 521,-2610
  region net NetD6_2: 676,-2804 29,-2804 19,-2814 19,-3093 38,-3112 407,-3112 426,-3093 426,-3024 452,-2998 672,-2998 692,-2978 692,-2820
  region net +5V: -322,-3514 -246,-3514 -231,-3499 -231,-3287 -52,-3108 -37,-3092 -37,-2611 -58,-2590 -59,-2591 -173,-2591 -197,-2615 -197,-2965 -334,-3102 -334,-3502
  region net NetC38_2: 1829,-2888 1829,-3092 1864,-3127 1864,-3179 1857,-3186 1736,-3186 1730,-3180 1730,-3090 1714,-3074 938,-3074 910,-3046 910,-2888
  region net +48V: 2660,-3260 2811,-3260 2819,-3268 2819,-3480 2601,-3698 2601,-3728 2576,-3753 2447,-3753 2433,-3739 2433,-3452 2632,-3452 2660,-3426
  region net VIN: 2623,-3185 2442,-3185 2408,-3219 2408,-3306 1916,-3306 1916,-3216 1908,-3208 1677,-3208 1663,-3222 1663,-3411 1686,-3434 2594,-3434 2631,-3397 2631,-3193
  region net VIN: 2237.94,-2315 2439,-2315 2445,-2321 2445,-3014 2494,-3063 2575,-3063 2632,-3120 2632,-3230 2628,-3234 2624,-3230 2406.61,-3230 2337.61,-3186 2234.94,-3186
  region net NetC12_2: 2586,-1856 2606,-1876 2606,-2075 2800,-2269 2800,-2492 2785,-2507 2534,-2507 2512,-2529 2467,-2529 2464,-2526 2464,-2404 2469,-2399 2516,-2399 2516,-2307 2368,-2159 2368,-1867 2379,-1856
  region net VCC_12_24: 2800,-1853 3047,-1853 3096,-1902 3096,-3856 2876.81,-3856 2878,-3598 2939,-3598 2941,-2235 2786,-2080 2786,-1867
Bottom Layer:
  rectangle net AGND1: 2258,-3695 2417,-3659
  rectangle net AGND1: 2306,-3776 2364,-3559
  rectangle net AGND1: 2686,-3698 2862,-3655
  rectangle net AGND1: 2765,-3798 2809,-3577
  rectangle net AGND1: 1726.17,-2736 1757,-2666.27
  rectangle net AGND1: 1679.73,-2883 1784,-2857.86
  rectangle net AGND1: 1891,-2885 2013,-2850
  rectangle net AGND1: 2618,-2739.22 2703,-2668
  rectangle net AGND1: 2471,-3263.9 2684.73,-3209
  rectangle net AGND1: 2720,-3170 2752,-3110
  rectangle net AGND1: 2708,-3168 2737,-3031
  rectangle net +12V: 668,-3528 893,-2332
  rectangle net +12V: 555,-3734 845,-3465

## Silkscreen, mask and mechanical layers (free items; w line width, h text height)
Top Overlay:
  text "水位开关1" at -422,77 h50
  text "5点温度传感器" at 960,76 h50
  text "iic湿度" at 1923,72 h50
  text "串口" at 2547,69 h50
  text "水位开关2" at 139,68 h50
  text "-  SW1" at 185,-45 h50
  text "5V" at 352,-47 h50
  text "-   SW1" at -432,-49 h50
  text "5V" at -236,-49 h50
  text "-     A1     -      A2     -     A3     -      A4    -      A5" at 668,-52 h50
  text "-     RX    TX    3.3V" at 2425,-53 h50
  text "-     SCL  SDA   3.3V" at 1813,-57 h50
  text "SWD" at -372.94,-845.46 h50
  text "GND" at -371,-942 h50
  text "SWCLK" at -369.97,-1030.03 h50
  text "3.3V" at -372,-1137 h50
  text "GND" at -374,-1312 h50
  text "RX3" at -374,-1407 h50
  text "TX3" at -369.68,-1504.84 h50
  text "+ -" at -554,-3261 h60 r180
  text "舌簧管" at -1075,-3466 h50
  text "加湿器" at -1079,-3764 h50
  text "+ -" at 1107,-3858.1 h60 r180
  text "+ -" at -559,-3866 h60 r180
  text "+ -" at 1616,-3868 h60 r180
  text "+ -" at 607,-3871 h60 r180
  text "- 48V" at 2292,-3923 h50
  text "- 48V" at 1858,-3924 h50
  text "- 12V" at 2759,-3924 h50
  text "风扇2" at 933,-4041 h50
  text "水泵" at 1468,-4044 h50
  text "48v输出" at 1892,-4044 h50
  text "风扇1" at 423,-4050 h50
  text "48v输入" at 2300,-4050 h50
  text "usb" at -250,-4055 h50
  text "压缩机" at 2793,-4058 h50
Bottom Overlay:
  text "OUT" at 162,-1211 h50
  text "GND" at 161,-1322 h50
  text "3.3V" at 169,-1438 h50
Mechanical 1:
  the board outline again, w10

## Text inside footprints (layer, text, board x,y; h text height)
Q1: Top Overlay "3" at 1422.43,-3211.91 h43.31 r90; Top Overlay "1" at 1422.43,-3347.74 h43.31 r90
Q2: Top Overlay "3" at 904.43,-3220.91 h43.31 r90; Top Overlay "1" at 904.43,-3356.74 h43.31 r90
Q3: Top Overlay "3" at 377.43,-3218.91 h43.31 r90; Top Overlay "1" at 377.43,-3354.74 h43.31 r90